# EAGLE board breakout-ws2812 (EAGLE 6.5.0)
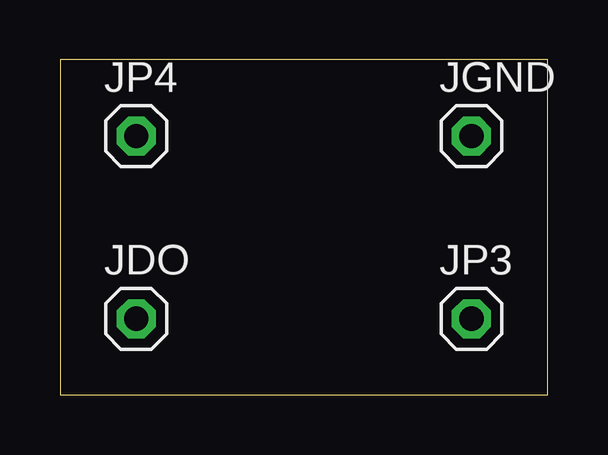
[diagram p0: board, top side]
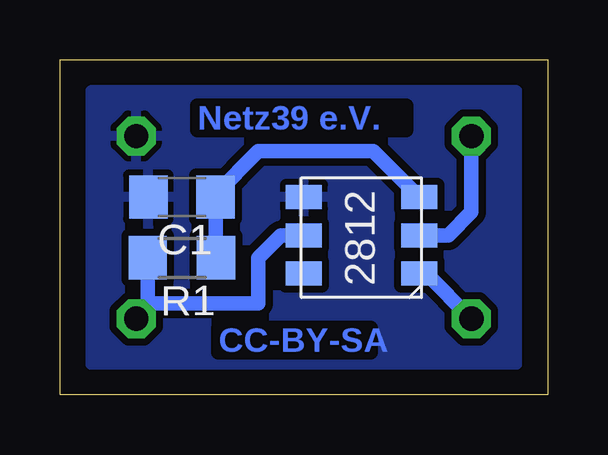
[diagram p1: board, bottom side, seen from below]

Size 20.32 x 13.97 mm. Coordinates in mm from the lower left corner, seen from the top.
Outline: 0,0 20.32,0 20.32,13.97 0,13.97 0,0
Copper layers (1*16): Top 0.035mm / dielectric 1.5mm / Bottom 0.035mm
Design rules "default *": minimum track width 12mil, minimum drill 24mil, track to track 12mil, track to pad 12mil, pad to pad 12mil, via to via 12mil, smd to smd 8mil, copper to edge 40mil, drill to drill 8mil, minimum pad ring 12mil, minimum via ring 12mil, stop-mask expansion 4mil, vias tented up to drill 0mil, thermal gap 10mil

## Footprints (pad centres in the part's own frame; a part is rotated, then mirrored left to right if it is on the bottom)
C1206 = smd 1.6 x 1.8: 1 -1.4,0; 2 1.4,0
1X01 = drill 1.016 octagon: 1 0,0
R1206 = smd 1.6 x 1.803: 1 -1.422,0; 2 1.422,0
WS2812 = smd 1.5 x 1: 1 4.8,-3.2; 2 4.8,-1.6; 3 4.8,0; 4 0,-3.2; 5 0,-1.6; 6 0,0

## Placement (x,y rotation side)
C1  [C1206]  15.24,8.26 180 bottom
JDO  DO  [1X01]  3.17,3.17 0 top
JGND  GND  [1X01]  17.14,10.79 0 top
JP3  VDD  [1X01]  17.14,3.17 0 top
JP4  DI  [1X01]  3.17,10.79 0 top
R1  [R1206]  15.24,5.71 180 bottom
U$1  WS2812  [WS2812]  10.16,8.26 0 bottom

## Library data of the parts
C1 R1 = resistor
JDO JGND JP3 JP4 = pinhead
U$1 = n39

## Nets
GND: C1.2 JGND.1 U$1.6
JDD: JP3.1 R1.2 U$1.5
JDI: JP4.1 U$1.2
N$2: JDO.1 U$1.1
N$3: C1.1 R1.1 U$1.3

## Tracks (layer width: path | path; a pad name or v marks a point on that pad's centre or on a via)
GND
  pour Bottom: 1.27,12.7 19.05,12.7 19.05,1.27 1.27,1.27
JDD
  Bottom 0.406: 16.51,3.81 16.66,3.96
  Bottom 0.61: JP3.1 16.51,3.81 12.06,3.81 12.06,5.71 11.12,6.66 U$1.5 | 16.66,3.96 R1.2
JDI
  Bottom 0.61: JP4.1 3.17,7.62 4.14,6.66 U$1.2
N$2
  Bottom 0.406: 5.05,5.05 U$1.1
  Bottom 0.61: JDO.1 5.05,5.05
N$3
  Bottom 0.406: R1.1 13.84,5.74 | 13.84,8.38 C1.1
  Bottom 0.61: 13.84,5.74 C1.1 | U$1.3 7.26,10.16 12.06,10.16 13.84,8.38

## Text on the board
Bottom: Netz39 e.V. | CC-BY-SA